# EAGLE board WS2811_Stepper_x2 (EAGLE 9.6.2)
DATE: 20210529; VER: Ver 1.0
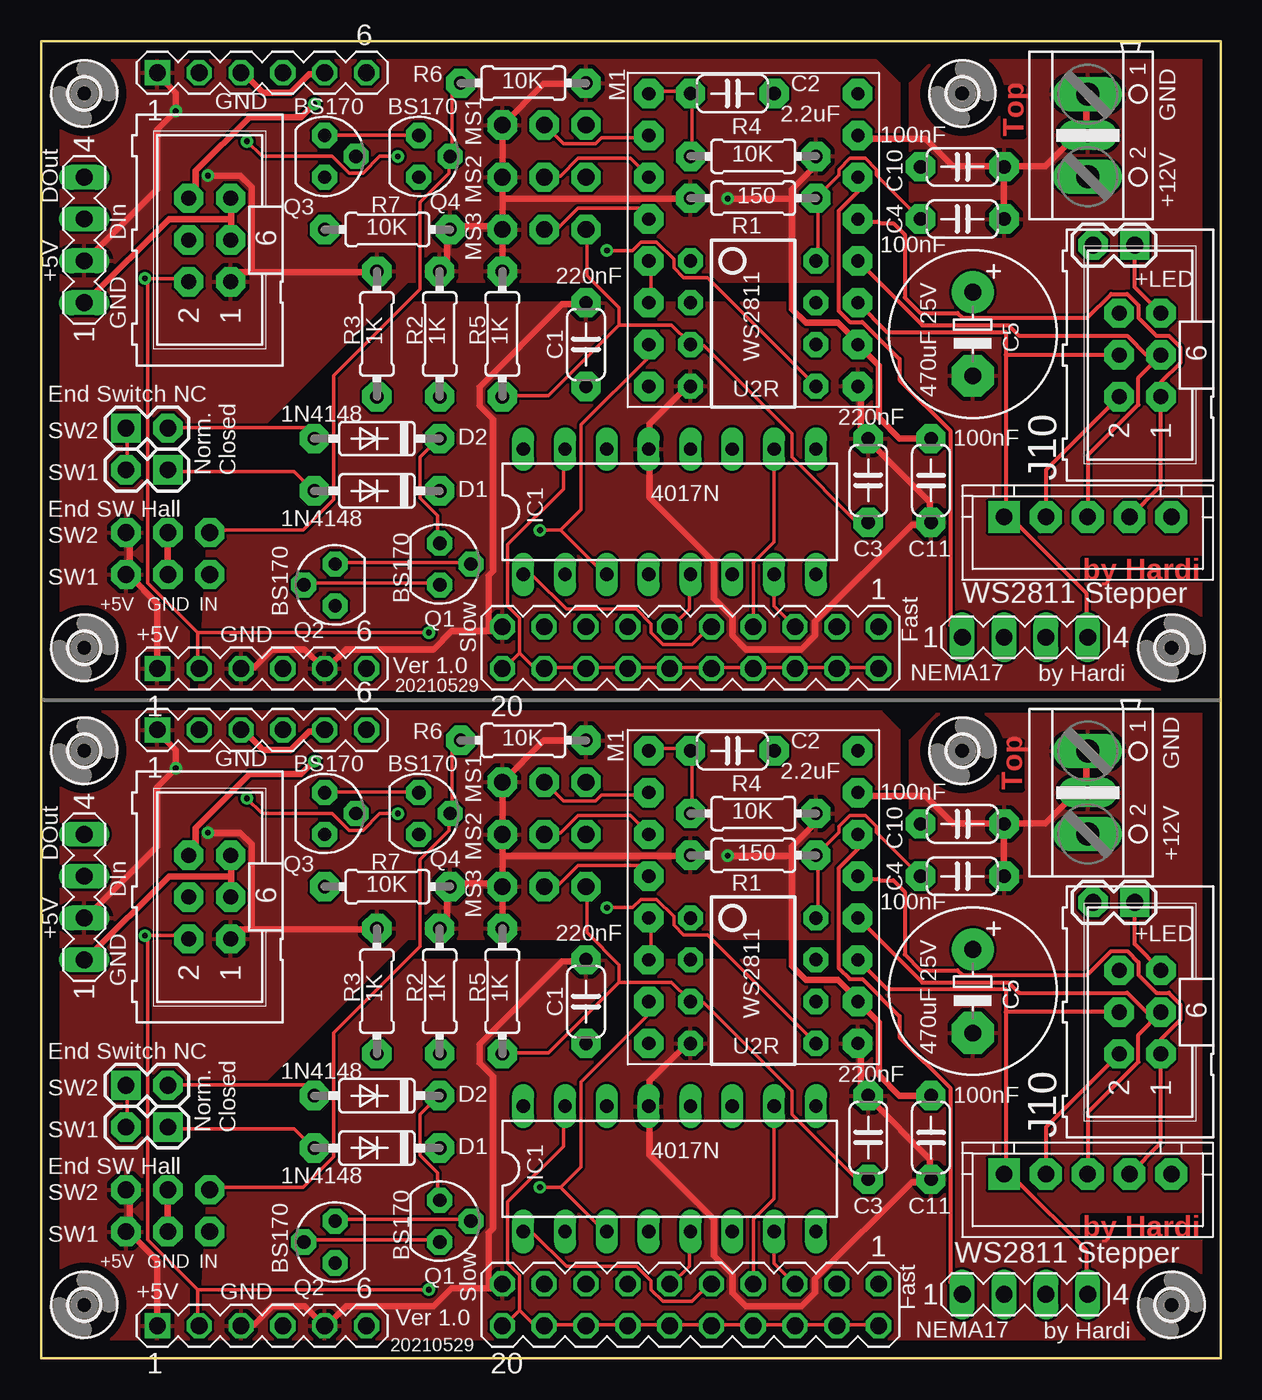
[diagram p0: board, top side]
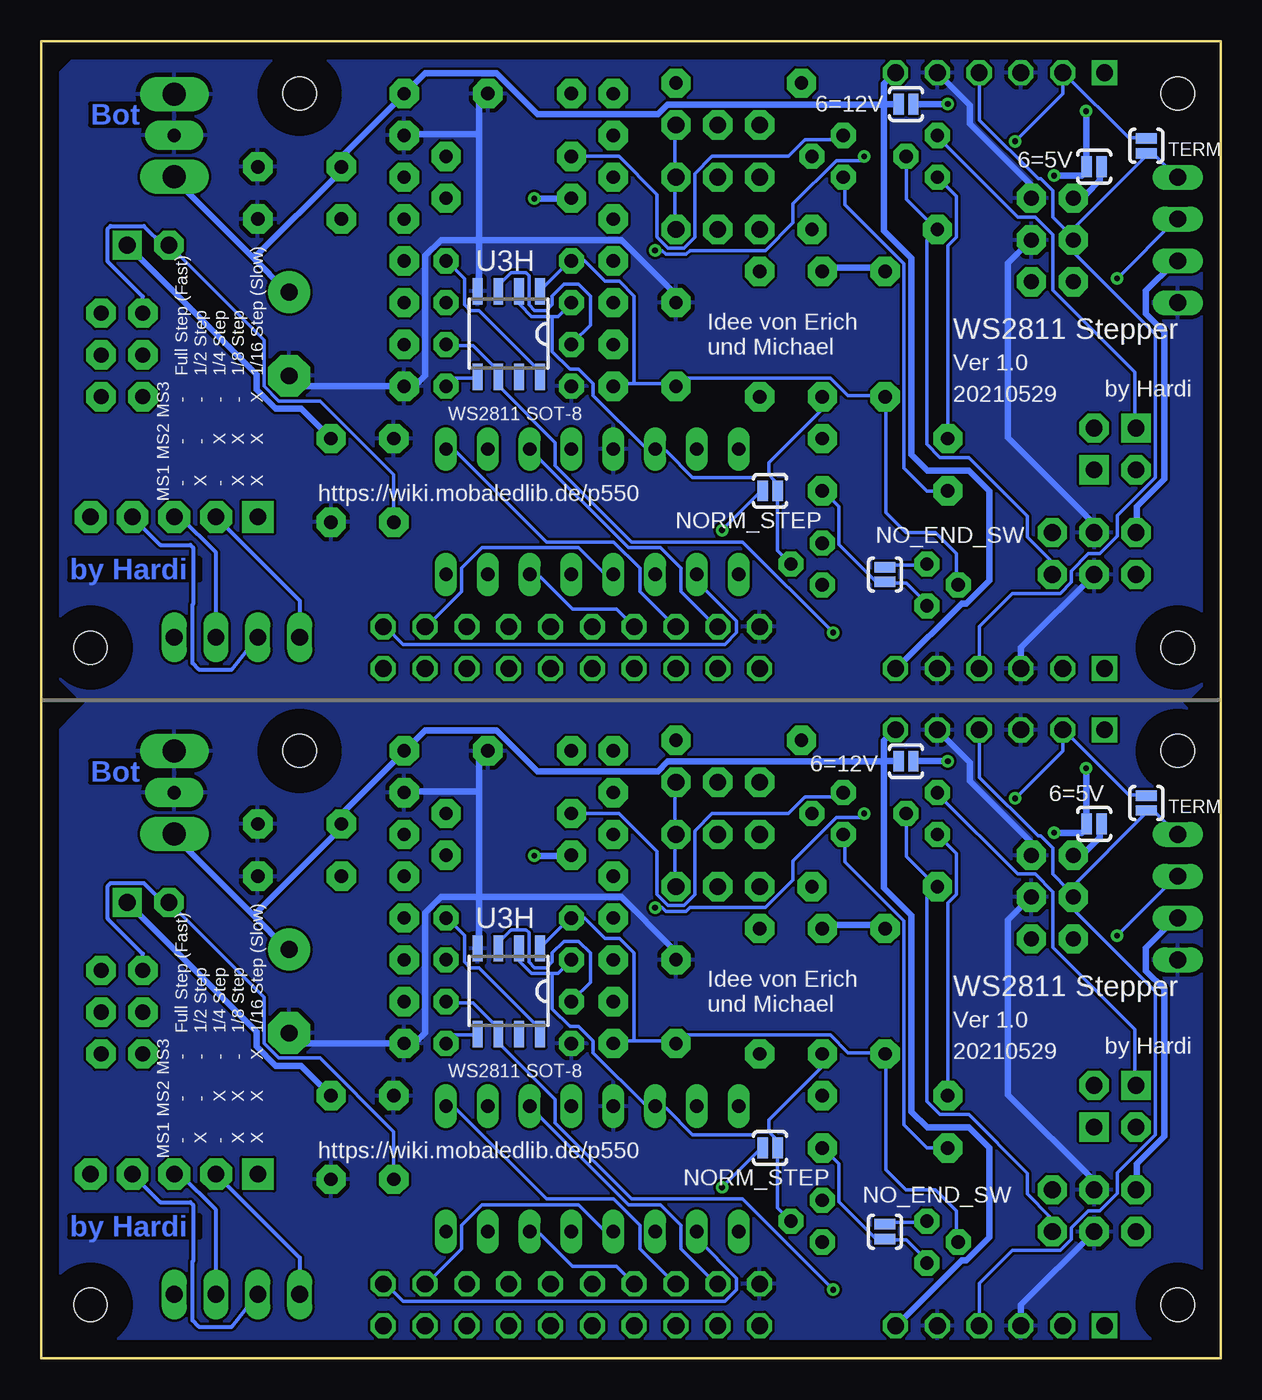
[diagram p1: board, bottom side, seen from below]

Size 71.66 x 80.01 mm. Coordinates in mm from the lower left corner, seen from the top.
Outline: 0,0 71.66,0 71.66,80.01 0,80.01 0,78.74 0,0.16 0,0
Copper layers (1*16): Top 0.035mm / dielectric 1.5mm / Bottom 0.035mm
Design rules "default": minimum track width 6mil, minimum drill 0.35mm, track to track 6mil, track to pad 6mil, pad to pad 6mil, via to via 6mil, smd to smd 6mil, copper to edge 40mil, drill to drill 6mil, minimum pad ring 10mil, minimum via ring 8mil, stop-mask expansion 4mil, vias tented up to drill 0mil, thermal gap 10mil

## Footprints (pad centres in the part's own frame; a part is rotated, then mirrored left to right if it is on the bottom)
SJ_2S-NO = smd 0.635 x 1.27: 1 -0.45,0; 2 0.45,0
C050-024X044 = drill 0.813 pad 1.778 octagon: 1 -2.54,0; 2 2.54,0
E5-10,5 = drill 1.016 pad 2.54: + -2.54,0 | drill 1.016 pad 2.54 octagon: - 2.54,0
1X02 = drill 1.016 pad 1.778 square: 1 0,0 | drill 1.016 pad 1.778 octagon: 2 2.54,0
1X03-CLEANBIG = drill 1.016 pad 1.778 octagon: 1 -2.54,0; 2 0,0; 3 2.54,0
STEPPER_CON = drill 1 pad 1.93 square: 1 0,0 | drill 1 pad 1.93 octagon: 2 2.54,0; 3 5.08,0; 4 7.62,0; 5 10.16,0
MA04-1 = drill 1.016 long: 1 -3.81,0; 2 -1.27,0; 3 1.27,0; 4 3.81,0
DO35-7 = drill 0.813 pad 1.778 octagon: A 3.81,0; C -3.81,0
2,0 = hole 2: 0,0
DIL16 = drill 0.813 long: 1 -8.89,-3.81; 2 -6.35,-3.81; 3 -3.81,-3.81; 4 -1.27,-3.81; 5 1.27,-3.81; 6 3.81,-3.81; 7 6.35,-3.81; 8 8.89,-3.81; 9 8.89,3.81; 10 6.35,3.81; 11 3.81,3.81; 12 1.27,3.81; 13 -1.27,3.81; 14 -3.81,3.81; 15 -6.35,3.81; 16 -8.89,3.81
ML6 = drill 0.914 pad 1.778 octagon: 1 -2.54,-1.27; 2 -2.54,1.27; 3 0,-1.27; 4 0,1.27; 5 2.54,-1.27; 6 2.54,1.27
BOARD_A4988 = drill 0.8 pad 1.778 octagon: +5V 1.27,16.51; DIR 13.97,19.05; ENABLE 13.97,1.27; GND 1.27,19.05; GNDMOT 1.27,3.81; M1A 1.27,11.43; M1B 1.27,13.97; M2A 1.27,8.89; M2AB 1.27,6.35; MS1 13.97,3.81; MS2 13.97,6.35; MS3 13.97,8.89; RESET 13.97,11.43; SLEEP 13.97,13.97; STEP 13.97,16.51; VMOT 1.27,1.27
SOT54E = drill 0.813 pad 1.524 octagon: D -1.27,0; G 0,1.905; S 1.27,0
RCL_0204/7 = drill 0.813 pad 1.778 octagon: 1 -3.81,0; 2 3.81,0
MA06-1 = drill 1.016 pad 1.524 square: 1 -6.35,0 | drill 1.016 pad 1.524 octagon: 2 -3.81,0; 3 -1.27,0; 4 1.27,0; 5 3.81,0; 6 6.35,0
MA10-2 = drill 1.016 octagon: 1 -11.43,-1.27; 2 -11.43,1.27; 3 -8.89,-1.27; 4 -8.89,1.27; 5 -6.35,-1.27; 6 -6.35,1.27; 7 -3.81,-1.27; 8 -3.81,1.27; 9 -1.27,-1.27; 10 -1.27,1.27; 11 1.27,-1.27; 12 1.27,1.27; 13 3.81,-1.27; 14 3.81,1.27; 15 6.35,-1.27; 16 6.35,1.27; 17 8.89,-1.27; 18 8.89,1.27; 19 11.43,-1.27; 20 11.43,1.27
S3PO_MODUL_WS2811_SOUND_MP3-TF-16P_WS2811_AND_ATTINY_WS2811_DIP08 = drill 0.813 pad 1.524 octagon: 1 -3.81,-3.81; 2 -1.27,-3.81; 3 1.27,-3.81; 4 3.81,-3.81; 5 3.81,3.81; 6 1.27,3.81; 7 -1.27,3.81; 8 -3.81,3.81
SOP8 = smd 0.6 x 1.6: 1 -1.905,-2.6; 2 -0.635,-2.6; 3 0.635,-2.6; 4 1.905,-2.6; 5 1.905,2.6; 6 0.635,2.6; 7 -0.635,2.6; 8 -1.905,2.6
AK500/2+M = drill 1.397 long: 1 -2.515,0; 2 2.515,0 | drill 0.813 pad 1.778 long: M 0,0

## Placement (x,y rotation side)
6=5V  SOLDERJUMPERNO  [SJ_2S-NO]  7.7,32.46 180 bottom
6=5V1  SOLDERJUMPERNO  [SJ_2S-NO]  7.7,72.38 180 bottom
6=12V  SOLDERJUMPERNO  [SJ_2S-NO]  19.13,36.27 0 bottom
6=12V1  SOLDERJUMPERNO  [SJ_2S-NO]  19.13,76.19 0 bottom
C1  220nF  [C050-024X044]  33.1,21.67 90 top
C2  2.2uF  [C050-024X044]  41.99,36.91 0 top
C3  220nF  [C050-024X044]  50.24,13.41 90 top
C4  100nF  [C050-024X044]  55.96,29.29 0 top
C5  470uF 25V  [E5-10,5]  56.59,22.3 270 top
C6  220nF  [C050-024X044]  33.1,61.58 90 top
C7  100nF  [C050-024X044]  55.96,72.38 0 top
C8  100nF  [C050-024X044]  54.05,53.33 270 top
C9  2.2uF  [C050-024X044]  41.99,76.82 0 top
C10  100nF  [C050-024X044]  55.96,32.46 0 top
C11  100nF  [C050-024X044]  54.05,13.41 270 top
C12  220nF  [C050-024X044]  50.24,53.33 90 top
C13  470uF 25V  [E5-10,5]  56.59,62.22 270 top
C14  100nF  [C050-024X044]  55.96,69.2 0 top
CON1  End SW1  [1X02]  5.16,16.59 0 top
CON2  End SW2  [1X02]  7.7,14.05 180 top
CON3  End SW1H  [1X03-CLEANBIG]  7.7,7.7 0 top
CON4  STEPPER_CON  [STEPPER_CON]  58.5,11.19 0 top
CON5  End SW2H  [1X03-CLEANBIG]  7.7,10.24 0 top
CON6  NEMA17  [MA04-1]  59.77,3.89 0 top
CON7  LED  [1X02]  66.43,27.7 180 top
CON8  End SW1  [1X02]  5.16,56.5 0 top
CON9  End SW2  [1X02]  7.7,53.96 180 top
CON10  STEPPER_CON  [STEPPER_CON]  58.5,51.11 0 top
CON11  End SW1H  [1X03-CLEANBIG]  7.7,47.61 0 top
CON12  End SW2H  [1X03-CLEANBIG]  7.7,50.15 0 top
CON13  NEMA17  [MA04-1]  59.77,43.8 0 top
CON14  LED  [1X02]  66.43,67.62 180 top
D1  1N4148  [DO35-7]  20.4,12.78 180 top
D2  1N4148  [DO35-7]  20.4,15.95 180 top
D3  1N4148  [DO35-7]  20.4,52.69 180 top
D4  1N4148  [DO35-7]  20.4,55.87 180 top
H1  MOUNT-HOLE2.0  [2,0]  68.66,3.25 0 top
H2  MOUNT-HOLE2.0  [2,0]  2.62,36.91 0 top
H3  MOUNT-HOLE2.0  [2,0]  2.62,3.25 0 top
H4  MOUNT-HOLE2.0  [2,0]  55.96,36.91 0 top
H5  MOUNT-HOLE2.0  [2,0]  68.66,43.17 0 top
H6  MOUNT-HOLE2.0  [2,0]  2.62,76.82 0 top
H7  MOUNT-HOLE2.0  [2,0]  2.62,43.17 0 top
H8  MOUNT-HOLE2.0  [2,0]  55.96,76.82 0 top
IC1  4017N  [DIL16]  38.18,11.51 0 top
IC2  4017N  [DIL16]  38.18,51.42 0 top
IN  [ML6]  10.24,28.02 90 top
IN1  [ML6]  10.24,67.93 90 top
J1  [ML6]  66.75,60.95 90 top
J10  [ML6]  66.75,21.03 90 top
JP1  MS1  [1X03-CLEANBIG]  30.56,35 0 top
JP2  MS2  [1X03-CLEANBIG]  30.56,31.83 0 top
JP3  MS3  [1X03-CLEANBIG]  30.56,28.65 0 top
JP4  MS1  [1X03-CLEANBIG]  30.56,74.92 0 top
JP5  MS2  [1X03-CLEANBIG]  30.56,71.74 0 top
JP6  MS3  [1X03-CLEANBIG]  30.56,68.57 0 top
M1  BOARD_A4988  [BOARD_A4988]  50.88,38.18 180 top
M2  BOARD_A4988  [BOARD_A4988]  50.88,78.09 180 top
NO_END_SW  SOLDERJUMPERNO  [SJ_2S-NO]  20.4,7.7 90 bottom
NO_END_SW1  SOLDERJUMPERNO  [SJ_2S-NO]  20.4,47.61 90 bottom
NORM_STEP  SOLDERJUMPERNO  [SJ_2S-NO]  27.38,12.78 180 bottom
NORM_STEP1  SOLDERJUMPERNO  [SJ_2S-NO]  27.38,52.69 180 bottom
Q1  BS170  [SOT54E]  24.21,8.33 270 top
Q2  BS170  [SOT54E]  17.86,7.06 90 top
Q3  BS170  [SOT54E]  17.22,33.1 270 top
Q4  BS170  [SOT54E]  22.94,33.1 270 top
Q5  BS170  [SOT54E]  24.21,48.25 270 top
Q6  BS170  [SOT54E]  17.86,46.98 90 top
Q7  BS170  [SOT54E]  17.22,73.01 270 top
Q8  BS170  [SOT54E]  22.94,73.01 270 top
R1  150  [RCL_0204/7]  43.26,30.56 0 top
R2  1K  [RCL_0204/7]  24.21,22.3 90 top
R3  1K  [RCL_0204/7]  20.4,22.3 90 top
R4  10K  [RCL_0204/7]  43.26,33.1 0 top
R5  1K  [RCL_0204/7]  28.02,22.3 90 top
R6  10K  [RCL_0204/7]  29.29,37.54 0 top
R7  10K  [RCL_0204/7]  21.03,28.65 0 top
R8  150  [RCL_0204/7]  43.26,70.47 0 top
R9  1K  [RCL_0204/7]  24.21,62.22 90 top
R10  1K  [RCL_0204/7]  20.4,62.22 90 top
R11  10K  [RCL_0204/7]  43.26,73.01 0 top
R12  1K  [RCL_0204/7]  28.02,62.22 90 top
R13  10K  [RCL_0204/7]  29.29,77.46 0 top
R14  10K  [RCL_0204/7]  21.03,68.57 0 top
SV1  [MA06-1]  13.41,1.98 0 top
SV2  [MA04-1]  2.62,28.02 90 top
SV3  [MA06-1]  13.41,38.18 0 top
SV4  [MA10-2]  39.45,3.25 180 top
SV5  [MA06-1]  13.41,41.9 0 top
SV6  [MA06-1]  13.41,78.09 0 top
SV7  [MA04-1]  2.62,67.93 90 top
SV8  [MA10-2]  39.45,43.17 180 top
TERM  SOLDERJUMPERNO  [SJ_2S-NO]  4.52,33.73 90 bottom
TERM1  SOLDERJUMPERNO  [SJ_2S-NO]  4.52,73.65 90 bottom
U2R  WS2811  [S3PO_MODUL_WS2811_SOUND_MP3-TF-16P_WS2811_AND_ATTINY_WS2811_DIP08]  43.26,22.94 270 top
U2R1  WS2811  [S3PO_MODUL_WS2811_SOUND_MP3-TF-16P_WS2811_AND_ATTINY_WS2811_DIP08]  43.26,62.85 270 top
U3H  WS2811 SOT-8  [SOP8]  43.26,22.3 180 bottom
U3H1  WS2811 SOT-8  [SOP8]  43.26,62.22 180 bottom
X1  AK500/2+M  [AK500/2+M]  63.58,34.37 270 top
X2  AK500/2+M  [AK500/2+M]  63.58,74.28 270 top

## Library data of the parts
6=5V 6=5V1 6=12V 6=12V1 NO_END_SW NO_END_SW1 NORM_STEP NORM_STEP1 TERM TERM1 = SparkFun-Retired
C1-C14 = resistor
CON1 CON2 CON7-CON9 CON14 = SparkFun-Connectors
CON3 CON5 CON11 CON12 JP1-JP6 = adafruit
CON4 CON10 = Connectors_Inline3_7
CON6 CON13 SV1-SV8 = con-lstb; OC_FARNELL: unknown; OC_NEWARK: unknown
D1-D4 = diode
H1-H8 = holes
IC1 IC2 = 40xx
IN IN1 J1 J10 = con-harting-ml; OC_FARNELL: unknown; OC_NEWARK: unknown
M1 M2 = Clean-Kong
Q1-Q8 = transistor-small-signal
R1-R14 = Sound_MP3-TF-16P_and_WS2811; SPICEPREFIX: R
U2R U2R1 = S3PO_Modul_WS2811; PROD_ID: IC-09439
U3H U3H1 = S3PO_Modul_WS2811
X1 X2 = Arduino_fuer_LEDs_DCC_2

## Nets
+5V: 6=5V.2 C11.1 CON3.1 CON5.1 CON7.1 IN.1 J10.5 JP1.1 JP2.1 JP3.1 M1.+5V R1.1 R2.2 R3.2 R4.2 R5.2 R6.2 R7.2 SV1.1 SV2.2 SV3.1
+5V1: 6=5V1.2 C8.1 CON11.1 CON12.1 CON14.1 IN1.1 J1.5 JP4.1 JP5.1 JP6.1 M2.+5V R8.1 R9.2 R10.2 R11.2 R12.2 R13.2 R14.2 SV5.1 SV6.1 SV7.2
DIR: C1.1 M1.DIR Q1.S Q2.G R3.1 U2R.1 U3H.1
DIR1: C6.1 M2.DIR Q5.S Q6.G R10.1 U2R1.1 U3H1.1
GND: C1.2 C2.2 C3.2 C4.2 C5.- C10.2 C11.2 CON3.2 CON5.2 IC1.13 IN.3 IN.5 M1.GND M1.GNDMOT SV1.3 SV1.5 SV2.1 SV3.3 SV3.5 SV4.19 U2R.4 U3H.4 X1.1 X1.M
GND1: C6.2 C7.2 C8.2 C9.2 C12.2 C13.- C14.2 CON11.2 CON12.2 IC2.13 IN1.3 IN1.5 M2.GND M2.GNDMOT SV5.3 SV5.5 SV6.3 SV6.5 SV7.1 SV8.19 U2R1.4 U3H1.4 X2.1 X2.M
LED: C3.1 CON7.2 J10.6 JP1.3 JP2.3 JP3.3 R5.1 U2R.3 U3H.3
LED1: C12.1 CON14.2 J1.6 JP4.3 JP5.3 JP6.3 R12.1 U2R1.3 U3H1.3
N$1: M1.RESET M1.SLEEP
N$2: IN.2 SV1.2 SV2.3 U2R.6 U3H.6
N$3: SV3.2 TERM.2 U2R.5 U3H.5
N$4: IN.4 SV1.4 SV2.4 SV3.4 TERM.1
N$5: C4.1 R1.2 U2R.8 U3H.8
N$6: C2.1 CON1.1 CON2.2 M1.ENABLE Q3.D Q4.D R4.1
N$7: 6=12V.1 C5.+ C10.1 M1.VMOT SV1.6 SV3.6 X1.2
N$8: CON2.1 D1.A Q4.S
N$9: CON1.2 D2.A Q3.S
N$10: CON5.3 Q4.G R6.1
N$11: D2.C Q1.D
N$12: JP6.2 M2.MS3
N$13: D1.C NO_END_SW.1 Q2.D
N$14: JP2.2 M1.MS2
N$15: 6=5V.1 6=12V.2 IN.6
N$16: CON3.3 Q3.G R7.1
N$17: JP5.2 M2.MS2
N$18: IC1.2 SV4.1
N$19: IC1.4 SV4.3
N$20: IC1.7 SV4.5
N$21: IC1.10 SV4.7
N$22: JP1.2 M1.MS1
N$23: IC1.1 SV4.9
N$24: IC1.5 SV4.11
N$25: IC1.6 SV4.13
N$26: IC1.9 SV4.15
N$27: JP3.2 M1.MS3
N$28: IC1.11 SV4.17
N$29: IC1.15 SV4.2 SV4.4 SV4.6 SV4.8 SV4.10 SV4.12 SV4.14 SV4.16 SV4.18 SV4.20
N$30: JP4.2 M2.MS1
N$31: CON4.2 CON6.1 J10.2 M1.M2AB
N$32: CON10.2 CON13.1 J1.2 M2.M2AB
N$33: IC1.3 M1.STEP NORM_STEP.2
N$34: CON10.4 CON13.2 J1.1 M2.M2A
N$35: CON4.1 CON6.4 J10.4 M1.M1B
N$36: CON10.3 CON13.3 J1.3 M2.M1A
N$37: CON10.1 CON13.4 J1.4 M2.M1B
N$38: M2.RESET M2.SLEEP
N$39: IN1.2 SV5.2 SV7.3 U2R1.6 U3H1.6
N$40: CON4.4 CON6.2 J10.1 M1.M2A
N$41: CON4.3 CON6.3 J10.3 M1.M1A
N$42: SV6.2 TERM1.2 U2R1.5 U3H1.5
N$43: IN1.4 SV5.4 SV6.4 SV7.4 TERM1.1
N$44: C14.1 R8.2 U2R1.8 U3H1.8
N$45: 6=12V1.1 C7.1 C13.+ M2.VMOT SV5.6 SV6.6 X2.2
N$46: C9.1 CON8.1 CON9.2 M2.ENABLE Q7.D Q8.D R11.1
N$47: CON9.1 D3.A Q8.S
N$48: CON8.2 D4.A Q7.S
N$49: D4.C Q5.D
N$50: D3.C NO_END_SW1.1 Q6.D
N$51: CON11.3 Q7.G R14.1
N$52: CON12.3 Q8.G R13.1
N$53: IC2.4 SV8.3
N$54: IC2.7 SV8.5
N$55: IC2.10 SV8.7
N$56: IC2.1 SV8.9
N$57: IC2.5 SV8.11
N$58: IC2.6 SV8.13
N$59: IC2.9 SV8.15
N$60: IC2.11 SV8.17
N$61: IC2.15 SV8.2 SV8.4 SV8.6 SV8.8 SV8.10 SV8.12 SV8.14 SV8.16 SV8.18 SV8.20
N$62: IC2.3 M2.STEP NORM_STEP1.2
N$63: IC2.2 SV8.1
N$64: 6=5V1.1 6=12V1.2 IN1.6
STEP: IC1.14 NO_END_SW.2 NORM_STEP.1 Q1.G Q2.S R2.1 U2R.2 U3H.2
STEP1: IC2.14 NO_END_SW1.2 NORM_STEP1.1 Q5.G Q6.S R9.1 U2R1.2 U3H1.2
VDD: IC1.16
VDD1: IC2.16
VSS: IC1.8
VSS1: IC2.8

## Tracks (layer width: path | path; a pad name or v marks a point on that pad's centre or on a via)
+5V  (via drill 0.35)
  Top 0.254: J10.5 66.43,25.16 CON7.1
  Top 0.406: SV1.1 7.06,5.94 5.39,7.62 CON3.1 5.39,7.9 5.39,10.13 CON5.1 | SV3.1 7.06,38.08 8.18,36.96 v8.18,35.84 7.06,34.72 7.06,31.09 2.87,26.9 SV2.2 | v10.13,31.93 12.09,31.93 12.78,31.24 12.78,26.06 | 45.62,30.53 45.62,23.82 46.46,22.99 48.41,22.99 49.53,21.87 M1.+5V 50.88,20.4 50.88,17.22 52.15,15.95 C11.1 | 45.62,30.53 45.62,31.09 47.02,32.49 47.02,33.05 R4.2 | R2.2 24.38,26.34 24.66,26.62 24.66,28.57 R7.2 24.94,28.85 28.02,28.85 | R5.2 JP3.1 28.02,28.85 | 28.02,28.85 28.02,30.53 | 28.02,30.53 JP2.1 JP1.1 30.53,37.52 33.05,37.52 R6.2 | 28.02,30.53 39.19,30.53 R1.1 | v41.71,30.53 45.62,30.53 | R3.2 20.19,26.06 12.78,26.06 | 12.78,26.06 12.09,26.06 IN.1
  Bottom 0.406: v8.18,35.84 8.18,32.49 6=5V.2 8.18,32.21 8.46,31.93 v10.13,31.93 | CON5.1 5.11,10.41 5.11,11.81 3.43,13.49 3.43,22.43 4.55,23.55 4.55,24.94 2.87,26.62 SV2.2 | R3.2 20.47,26.34 24.1,26.34 R2.2 | v41.71,30.53 39.47,30.53 R1.1 | C11.1 55.88,17.78 57.41,17.78 58.57,18.94 58.57,19.84 CON7.1
  pour Top: 0.08,0.71 0.08,39.29 51.03,39.29 52.15,38.18 52.15,27.38 50.24,25.48 22.3,25.48 8.97,12.14 8.97,0.71
+5V1  (via drill 0.35)
  Top 0.254: J1.5 66.43,65.08 CON14.1
  Top 0.406: SV5.1 7.06,45.86 5.39,47.54 CON11.1 5.39,47.82 5.39,50.05 CON12.1 | SV6.1 7.06,77.99 8.18,76.88 v8.18,75.76 7.06,74.64 7.06,71.01 2.87,66.82 SV7.2 | v10.13,71.85 12.09,71.85 12.78,71.16 12.78,65.98 | 45.62,70.45 45.62,63.74 46.46,62.91 48.41,62.91 49.53,61.79 M2.+5V 50.88,60.31 50.88,57.14 52.15,55.87 C8.1 | 45.62,70.45 45.62,71.01 47.02,72.41 47.02,72.96 R11.2 | R9.2 24.38,66.26 24.66,66.54 24.66,68.49 R14.2 24.94,68.77 28.02,68.77 | R12.2 JP6.1 28.02,68.77 | 28.02,68.77 28.02,70.45 | 28.02,70.45 JP5.1 JP4.1 30.53,77.43 33.05,77.43 R13.2 | 28.02,70.45 39.19,70.45 R8.1 | v41.71,70.45 45.62,70.45 | R10.2 20.19,65.98 12.78,65.98 | 12.78,65.98 12.09,65.98 IN1.1
  Bottom 0.406: v8.18,75.76 8.18,72.41 6=5V1.2 8.18,72.12 8.46,71.85 v10.13,71.85 | CON12.1 5.11,50.33 5.11,51.73 3.43,53.41 3.43,62.35 4.55,63.46 4.55,64.86 2.87,66.54 SV7.2 | R10.2 20.47,66.26 24.1,66.26 R9.2 | v41.71,70.45 39.47,70.45 R8.1 | C8.1 55.88,57.7 57.41,57.7 58.57,58.86 58.57,59.76 CON14.1
  pour Top: 0.08,40.63 0.08,79.68 49.92,79.68 52.15,77.46 52.15,67.3 50.24,65.39 22.3,65.39 8.97,52.06 8.97,40.63
DIR
  Top 0.203: Q2.G 16.08,7.19 24.08,7.19 Q1.S
  Bottom 0.203: U3H.1 41.33,24.97 39.55,26.75 U2R.1 38.66,26.75 37.41,25.5 36.53,25.5 35.64,24.61 35.64,19.28 | 35.64,19.28 33.15,19.28 C1.1 32.97,19.28 32.61,19.63 23.72,19.63 22.66,18.57 20.52,18.57 R3.1 20.35,18.39 20.35,11.46 19.13,10.24 17.35,10.24 16.08,8.97 16.08,7.19 Q2.G | 35.64,19.28 36.88,19.28 M1.DIR
DIR1
  Top 0.203: Q6.G 16.08,47.11 24.08,47.11 Q5.S
  Bottom 0.203: U3H1.1 41.33,64.89 39.55,66.66 U2R1.1 38.66,66.66 37.41,65.42 36.53,65.42 35.64,64.53 35.64,59.2 | 35.64,59.2 33.15,59.2 C6.1 32.97,59.2 32.61,59.55 23.72,59.55 22.66,58.48 20.52,58.48 R10.1 20.35,58.31 20.35,51.37 19.13,50.15 17.35,50.15 16.08,48.88 16.08,47.11 Q6.G | 35.64,59.2 36.88,59.2 M2.DIR
GND
  Top 0.406: 11.53,29.29 11.53,30.53 IN.5 | 11.53,29.29 11.53,28.02 IN.3 | SV2.1 2.87,24.38 7.77,29.29 11.53,29.29 | SV3.5 17.12,38.08 16.28,38.08 15.16,36.96 13.49,36.96 12.37,38.08 SV3.3 | U2R.4 39.19,19.07 36.96,16.84 36.96,15.44 IC1.13 36.96,15.16 36.96,12.37 40.87,8.46 40.87,6.22 41.99,5.11 41.99,3.99 42.82,3.15 46.18,3.15 47.02,3.99 47.02,4.83 52.88,10.69 54,10.69 C11.2 54,10.97 54,12.09 50.37,15.72 C3.2 50.09,16 49.81,16.28 49.81,19.07 M1.GND | SV1.3 12.37,2.03 12.93,2.03 14.05,3.15 16,3.15 17.12,2.03 SV1.5 17.4,2.03 18.52,3.15 23.83,3.15 24.94,4.27 27.18,4.27 | 27.18,4.27 28.02,4.27 SV4.19 | C4.2 58.47,29.41 58.47,32.21 C10.2 | X1.1 63.5,36.68 63.5,34.44 X1.M 63.5,34.16 62.66,34.16 60.99,32.49 58.75,32.49 C10.2 | C10.2 58.47,32.49 55.4,32.49 53.72,34.16 49.81,34.16 M1.GNDMOT | 27.18,4.27 27.18,7.62 27.46,7.9 27.46,17.12 26.62,17.96 26.62,19.07 31.65,24.11 33.05,24.11 C1.2 | CON3.2 CON5.2
  Bottom 0.406: IN.3 11.53,28.02 12.93,26.62 12.93,16 7.7,10.77 CON5.2 | IN.5 11.53,30.81 11.53,31.37 15.24,35.08 15.24,36.2 SV3.5 | 45.06,34.44 45.06,36.4 44.78,36.68 C2.2 | 45.06,34.44 45.06,28.02 | 45.06,28.02 45.06,24.94 U3H.4 | 45.06,28.02 36.4,28.02 33.33,24.94 33.33,24.38 C1.2 | 45.06,34.44 49.53,34.44 M1.GNDMOT | CON3.2 12.14,3.25 SV1.3 | C5.- 55.96,19.13 M1.GND 48.97,19.13 48.34,19.76 48.34,27.06 47.38,28.02 45.06,28.02
  pour Top: 9.6,0.71 10.24,12.14 22.3,24.21 49.92,24.21 52.78,27.06 52.78,37.54 54.37,39.13 71.2,39.13 71.2,0.71
  pour Bottom: 1.82,0.23 0.08,1.98 0.08,37.54 2.3,39.76 68.97,39.76 71.2,37.54 71.2,1.98 69.45,0.23
GND1
  Top 0.406: 11.53,69.2 11.53,70.45 IN1.5 | 11.53,69.2 11.53,67.93 IN1.3 | SV7.1 2.87,64.3 7.77,69.2 11.53,69.2 | SV6.5 17.12,77.99 16.28,77.99 15.16,76.88 13.49,76.88 12.37,77.99 SV6.3 | U2R1.4 39.19,58.99 36.96,56.76 36.96,55.36 IC2.13 36.96,55.08 36.96,52.29 40.87,48.38 40.87,46.14 41.99,45.02 41.99,43.91 42.82,43.07 46.18,43.07 47.02,43.91 47.02,44.74 52.88,50.61 54,50.61 C8.2 54,50.89 54,52.01 50.37,55.64 C12.2 50.09,55.92 49.81,56.2 49.81,58.99 M2.GND | SV5.3 12.37,41.95 12.93,41.95 14.05,43.07 16,43.07 17.12,41.95 SV5.5 17.4,41.95 18.52,43.07 23.83,43.07 24.94,44.19 27.18,44.19 | 27.18,44.19 28.02,44.19 SV8.19 | C14.2 58.47,69.33 58.47,72.12 C7.2 | X2.1 63.5,76.6 63.5,74.36 X2.M 63.5,74.08 62.66,74.08 60.99,72.41 58.75,72.41 C7.2 | C7.2 58.47,72.41 55.4,72.41 53.72,74.08 49.81,74.08 M2.GNDMOT | 27.18,44.19 27.18,47.54 27.46,47.82 27.46,57.04 26.62,57.88 26.62,58.99 31.65,64.02 33.05,64.02 C6.2 | CON11.2 CON12.2
  Bottom 0.406: IN1.3 11.53,67.93 12.93,66.54 12.93,55.92 7.7,50.69 CON12.2 | IN1.5 11.53,70.73 11.53,71.29 15.24,75 15.24,76.11 SV6.5 | 45.06,74.36 45.06,76.32 44.78,76.6 C9.2 | 45.06,74.36 45.06,67.93 | 45.06,67.93 45.06,64.86 U3H1.4 | 45.06,67.93 36.4,67.93 33.33,64.86 33.33,64.3 C6.2 | 45.06,74.36 49.53,74.36 M2.GNDMOT | CON11.2 12.14,43.17 SV5.3 | C13.- 55.96,59.04 M2.GND 48.97,59.04 48.34,59.68 48.34,66.97 47.38,67.93 45.06,67.93
  pour Top: 9.6,40.63 10.24,52.06 22.3,64.12 49.92,64.12 52.78,66.98 52.78,77.46 55,79.68 71.2,79.68 71.2,40.63
  pour Bottom: 1.82,40.15 0.08,41.9 0.08,77.46 2.3,79.68 68.97,79.68 71.2,77.46 71.2,41.9 69.45,40.15
LED
  Top 0.203: C3.1 50.22,10.92 49.5,10.92 45.59,14.83 45.59,16.26 40.26,21.59 39.55,21.59 U2R.3 39.37,21.77 38.3,22.84 35.1,22.84 | 35.1,22.84 30.84,18.57 28.17,18.57 R5.1 | 35.1,22.84 35.1,23.9 33.15,25.86 33.15,28.52 JP3.3
  Bottom 0.203: JP3.3 33.15,28.7 33.15,31.73 JP2.3 33.15,31.9 33.15,34.92 JP1.3 | U3H.3 43.82,24.97 43.82,25.32 43.1,26.04 42.22,26.04 42.04,25.86 42.04,24.08 41.68,23.72 40.97,23.72 40.61,24.08 40.61,24.61 39.9,25.32 39.01,25.32 38.3,24.61 38.3,22.84 39.37,21.77 U2R.3 | CON7.2 58.12,21.92 58.12,19.13 57.22,18.24 54.72,18.24 50.24,13.76 C3.1
  Bottom 0.254: CON7.2 64.26,27.7 65.43,28.87 67.44,28.87 67.6,28.7 67.6,26.69 65.48,24.57 J10.6
LED1
  Top 0.203: C12.1 50.22,50.84 49.5,50.84 45.59,54.75 45.59,56.17 40.26,61.51 39.55,61.51 U2R1.3 39.37,61.69 38.3,62.75 35.1,62.75 | 35.1,62.75 30.84,58.48 28.17,58.48 R12.1 | 35.1,62.75 35.1,63.82 33.15,65.78 33.15,68.44 JP6.3
  Bottom 0.203: JP6.3 33.15,68.62 33.15,71.64 JP5.3 33.15,71.82 33.15,74.84 JP4.3 | U3H1.3 43.82,64.89 43.82,65.24 43.1,65.95 42.22,65.95 42.04,65.78 42.04,64 41.68,63.64 40.97,63.64 40.61,64 40.61,64.53 39.9,65.24 39.01,65.24 38.3,64.53 38.3,62.75 39.37,61.69 U2R1.3 | CON14.2 58.12,61.84 58.12,59.05 57.22,58.16 54.72,58.16 50.24,53.68 C12.1
  Bottom 0.254: CON14.2 64.26,67.62 65.43,68.78 67.44,68.78 67.6,68.62 67.6,66.61 65.48,64.49 J1.6
N$1
  Top 0.203: M1.SLEEP 37.06,24.26 37.06,26.75 M1.RESET
N$2  (via drill 0.35)
  Top 0.203: 6.48,25.68 8.79,25.68 8.97,25.5 IN.2 | 9.5,4.17 9.5,2.03 SV1.2 | 9.5,4.17 6.48,7.19 6.48,25.68 | 6.48,25.68 v6.3,25.68 | 9.5,4.17 v23.55,4.17
  Bottom 0.203: U2R.6 47.02,21.59 45.42,21.59 43.99,20.17 43.99,19.81 U3H.6 43.82,19.63 43.82,19.1 40.44,15.72 40.44,14.3 35.81,9.68 29.06,9.68 v23.55,4.17 | v6.3,25.68 2.74,29.23 SV2.3
N$3  (via drill 0.35)
  Top 0.203: v34.37,27.38 35.93,27.38 36.43,27.89 37.38,27.89 38.43,26.84 38.43,26.32 39.03,25.73 40.46,25.73 U2R.5 | v12.49,34.01 13.41,33.1 17.69,33.1 18.71,32.08 19.55,32.08 20.56,33.1 v21.67,33.1
  Bottom 0.203: U3H.5 45.24,19.63 46.66,19.63 47.02,19.28 U2R.5 | TERM.2 4.52,34.21 5.59,34.21 9.5,38.12 SV3.2 9.6,36.91 v12.49,34.01 | v34.37,27.38 33.95,27.38 33.72,27.15 32.48,27.15 32.25,27.38 27.67,27.38 25.98,29.07 25.98,30.21 23.36,32.84 21.92,32.84 v21.67,33.1
N$4
  Bottom 0.203: 4.52,33.15 3.99,33.15 2.74,31.9 SV2.4 | IN.4 8.97,27.28 3.99,22.3 3.99,13.59 6.3,11.28 6.3,10.02 7.35,8.97 8.04,8.97 9.09,7.92 9.09,7.22 9.76,6.55 12.65,6.55 14.66,4.55 14.66,2.03 SV1.4 | 9.32,28.52 8.97,28.17 IN.4 | 9.32,28.52 10.21,29.41 10.21,31.01 10.92,31.73 11.1,31.73 14.66,35.28 14.66,38.12 SV3.4 | 4.52,33.15 9.14,28.52 9.32,28.52 | 4.52,33.15 TERM.1 | 9.32,28.52 IN.4
N$5
  Top 0.203: U2R.8 47.19,26.75 47.19,30.48 R1.2 48.46,31.95 48.46,32.3 49.13,32.97 50.08,32.97 50.75,32.3 50.75,31.95 C4.1
  Bottom 0.203: U3H.8 41.5,19.81 41.5,20.17 45.06,23.72 45.59,23.72 45.95,24.08 45.95,25.68 47.02,26.75 U2R.8
N$6
  Top 0.203: R4.1 39.55,33.15 39.55,36.88 C2.1 39.37,37.06 37.06,37.06 M1.ENABLE | CON2.2 5.23,14.12 5.23,16.43 CON1.1 | Q3.D 17.32,34.39 22.83,34.39 Q4.D
  Bottom 0.203: CON1.1 5.23,16.61 5.23,19.99 10.21,24.97 10.21,28.35 11.28,29.41 12.34,29.41 17.15,34.21 Q3.D | Q4.D 23.19,34.11 25.26,34.11 26.28,33.1 30.9,33.1 31.95,32.05 31.95,28.18 32.62,27.51 33.57,27.51 34.24,28.18 34.24,30.78 36.56,33.1 R4.1
N$7
  Bottom 0.406: SV3.6 19.91,38.08 20.47,37.52 20.47,36.27 | 20.47,36.27 20.47,28.59 18.8,26.91 18.8,14.99 17.83,14.02 15.29,14.02 14.05,12.78 14.05,7.34 15.44,5.94 15.72,5.94 19.63,2.03 SV1.6 | 58.75,26.9 56.79,24.94 C5.+ | 58.75,26.9 63.5,31.65 X1.2 | 58.75,26.9 53.44,32.21 C10.1 53.16,32.49 53.16,33.33 49.81,36.68 M1.VMOT 49.53,36.96 48.34,38.15 44.01,38.15 41.52,35.66 34.2,35.66 33.61,36.25 20.5,36.25 20.47,36.27 | 6=12V.1 20.47,36.27
N$8
  Top 0.203: CON2.1 7.72,13.95 15.37,13.95 16.43,12.88 D1.A
  Bottom 0.203: Q4.S 22.83,31.73 22.83,30.17 19.25,26.59 19.25,14.17 17.86,12.78 D1.A
N$9
  Top 0.203: 16.08,16.61 16.08,16.43 16.43,16.08 D2.A 16.08,16.61 | 16.08,16.61 7.72,16.61 CON1.2
  Bottom 0.203: D2.A 16.59,27.67 16.08,28.18 16.08,30.68 Q3.S
N$10
  Top 0.203: R6.1 25.32,37.41 24.97,37.06 24.97,33.15 Q4.G 24.79,32.97 24.79,32.08 23.01,30.3 23.01,25.02 17.75,19.76 17.75,12.24 15.9,10.39 10.39,10.39 CON5.3
N$11
  Top 0.203: Q1.D 24.08,9.68 24.08,11.28 23.01,12.34 23.01,14.83 24.08,15.9 D2.C
N$12
  Top 0.203: JP6.2 30.66,68.62 31.37,68.62 32.61,69.86 36.35,69.86 36.88,69.33 M2.MS3
N$13
  Bottom 0.203: Q2.D 17.86,5.94 19.1,7.19 20.35,7.19 NO_END_SW.1 20.52,7.37 21.06,7.37 23.19,9.5 23.19,11.81 24.08,12.7 D1.C
N$14
  Top 0.203: JP2.2 30.66,31.9 31.55,31.9 32.61,32.97 35.81,32.97 36.88,31.9 M1.MS2
N$15  (via drill 0.35)
  Top 0.406: v16.59,36.27 15.8,35.48 12.65,35.48 9.4,32.23 9.4,30.99 IN.6
  Bottom 0.406: 6=5V.1 7.34,32.21 7.34,31.65 8.18,30.81 8.74,30.81 IN.6 | 6=12V.2 v16.59,36.27
N$16
  Bottom 0.203: Q3.G 19.1,32.97 19.1,30.48 17.32,28.7 R7.1 17.86,28.02 17.86,15.61 17.06,14.81 15.32,14.81 11.76,11.25 11.76,9.98 10.39,8.61 10.39,7.72 CON3.3
N$17
  Top 0.203: JP5.2 30.66,71.82 31.55,71.82 32.61,72.89 35.81,72.89 36.88,71.82 M2.MS2
N$18
  Bottom 0.203: IC1.2 31.72,7.54 31.72,7.19 29.41,4.88 29.41,4.17 30.12,3.45 49.68,3.45 50.75,4.52 SV4.1
N$19
  Bottom 0.203: IC1.4 37.06,7.72 37.41,7.72 39.01,9.32 44.88,9.32 46.13,8.08 46.13,6.66 48.26,4.52 SV4.3
N$20
  Top 0.203: IC1.7 44.53,5.77 45.77,4.52 SV4.5
N$21
  Top 0.203: IC1.10 44.53,9.68 43.28,8.43 43.28,4.52 SV4.7
N$22
  Top 0.203: M1.MS1 36.88,34.21 34.04,34.21 33.68,33.86 31.72,33.86 30.66,34.92 JP1.2
N$23
  Top 0.203: IC1.1 29.41,7.54 29.95,7.54 31.9,5.59 36.17,5.59 37.06,4.7 37.06,4.17 37.77,3.45 39.55,3.45 40.61,4.52 SV4.9
N$24
  Top 0.203: IC1.5 39.37,7.54 39.37,5.59 38.3,4.52 SV4.11
N$25
  Bottom 0.203: SV4.13 36.7,5.59 39.37,5.59 41.33,7.54 41.86,7.54 IC1.6
N$26
  Bottom 0.203: IC1.9 47.02,15.19 46.48,15.19 40.97,9.68 36.88,9.68 35.28,8.08 35.28,6.66 33.15,4.52 SV4.15
N$27
  Top 0.203: JP3.2 30.66,28.7 31.37,28.7 32.61,29.95 36.35,29.95 36.88,29.41 M1.MS3
N$28
  Bottom 0.203: IC1.11 35.99,9.32 34.04,9.32 32.79,8.08 32.79,6.66 30.66,4.52 SV4.17
N$29
  Top 0.203: SV4.2 50.75,2.03 48.44,2.03 SV4.4 48.26,2.03 45.95,2.03 SV4.6 45.77,2.03 43.28,2.03 SV4.8 43.1,2.03 40.79,2.03 SV4.10 40.61,2.03 38.3,2.03 SV4.12 38.13,2.03 35.64,2.03 | 29.06,2.92 29.06,5.05 28.35,5.77 28.35,9.5 31.72,12.88 31.72,15.19 IC1.15 | 29.06,2.92 28.17,2.03 SV4.20 | 29.06,2.92 29.95,2.03 30.48,2.03 SV4.18 30.66,2.03 32.97,2.03 SV4.16 33.15,2.03 35.64,2.03 | 35.64,2.03 SV4.14
N$30
  Top 0.203: M2.MS1 36.88,74.13 34.04,74.13 33.68,73.78 31.72,73.78 30.66,74.84 JP4.2
N$31
  Top 0.254: M1.M2AB 49.61,30.94 48.44,29.77 48.44,23.72 49.12,23.04 49.89,23.04 52.15,20.78 52.15,19.51 55.22,16.43 55.22,4.62 CON6.1 | CON4.2 61.04,14.05 J10.2
  Bottom 0.254: CON4.2 55.96,6.11 CON6.1
N$32
  Top 0.254: M2.M2AB 49.61,70.86 48.44,69.69 48.44,63.64 49.12,62.96 49.89,62.96 52.15,60.7 52.15,59.43 55.22,56.35 55.22,44.54 CON13.1 | CON10.2 61.04,53.96 J1.2
  Bottom 0.254: CON10.2 55.96,46.03 CON13.1
N$33  (via drill 0.35)
  Top 0.203: 31.55,10.39 v30.3,10.39 | 31.55,10.39 34.21,7.72 IC1.3 | 31.55,10.39 32.79,11.63 32.79,16.79 36.88,20.88 36.88,21.59 M1.STEP
  Bottom 0.203: v30.3,10.39 27.99,12.7 NORM_STEP.2
N$34
  Top 0.254: M2.M2A 49.66,69.05 50.85,69.05 50.95,68.95 51.77,68.95 52.46,68.25 52.46,64.44 53.42,63.49 55.67,63.49 55.95,63.21 63.55,63.21 65,64.66 65.97,64.66 66.65,63.97 66.65,63.21 67.74,62.12 68.51,62.12 69.19,61.43 69.19,60.47 68.02,59.3 J1.1 68.02,53.01 CON10.4
  Bottom 0.254: CON13.2 60.06,41.85 62.08,41.85 62.46,42.23 62.46,45.78 62.44,45.8 62.44,49.24 62.6,49.41 64.41,49.41 CON10.4
N$35
  Top 0.254: CON6.4 63.47,3.96 63.47,6.58 59.23,10.82 CON4.1 58.6,11.34 58.6,21.03 | 58.6,21.03 58.6,22.43 51.38,22.43 M1.M1B | J10.4 58.6,21.03
N$36
  Top 0.254: M2.M1A 53.52,62.75 58.77,62.75 59.4,62.12 65.97,62.12 67.13,60.95 J1.3 66.65,59.58 66.65,57.92 63.58,54.85 CON10.3
  Bottom 0.254: CON13.3 61.04,48.94 63.21,51.11 CON10.3
N$37
  Top 0.254: CON13.4 63.47,43.88 63.47,46.5 59.23,50.74 CON10.1 58.6,51.26 58.6,60.95 | 58.6,60.95 58.6,62.35 51.38,62.35 M2.M1B | J1.4 58.6,60.95
N$38
  Top 0.203: M2.SLEEP 37.06,64.17 37.06,66.66 M2.RESET
N$39  (via drill 0.35)
  Top 0.203: 6.48,65.6 8.79,65.6 8.97,65.42 IN1.2 | 9.5,44.08 9.5,41.95 SV5.2 | 9.5,44.08 6.48,47.11 6.48,65.6 | 6.48,65.6 v6.3,65.6 | 9.5,44.08 v23.55,44.08
  Bottom 0.203: U2R1.6 47.02,61.51 45.42,61.51 43.99,60.09 43.99,59.73 U3H1.6 43.82,59.55 43.82,59.02 40.44,55.64 40.44,54.22 35.81,49.59 29.06,49.59 v23.55,44.08 | v6.3,65.6 2.74,69.15 SV7.3
N$40
  Top 0.254: M1.M2A 49.66,29.13 50.85,29.13 50.95,29.03 51.77,29.03 52.46,28.33 52.46,24.52 53.42,23.57 55.67,23.57 55.95,23.29 63.55,23.29 65,24.74 65.97,24.74 66.65,24.05 66.65,23.29 67.74,22.2 68.51,22.2 69.19,21.52 69.19,20.55 68.02,19.38 J10.1 68.02,13.09 CON4.4
  Bottom 0.254: CON6.2 60.06,1.93 62.08,1.93 62.46,2.31 62.46,5.87 62.44,5.89 62.44,9.32 62.6,9.49 64.41,9.49 CON4.4
N$41
  Top 0.254: M1.M1A 53.52,22.84 58.77,22.84 59.4,22.2 65.97,22.2 67.13,21.03 J10.3 66.65,19.66 66.65,18.01 63.58,14.93 CON4.3
  Bottom 0.254: CON6.3 61.04,9.02 63.21,11.19 CON4.3
N$42  (via drill 0.35)
  Top 0.203: v34.37,67.3 35.93,67.3 36.43,67.81 37.38,67.81 38.43,66.76 38.43,66.24 39.03,65.65 40.46,65.65 U2R1.5 | v12.49,73.93 13.41,73.01 17.69,73.01 18.71,72 19.55,72 20.56,73.01 v21.67,73.01
  Bottom 0.203: U3H1.5 45.24,59.55 46.66,59.55 47.02,59.2 U2R1.5 | TERM1.2 4.52,74.13 5.59,74.13 9.5,78.04 SV6.2 9.6,76.82 v12.49,73.93 | v34.37,67.3 33.95,67.3 33.72,67.07 32.48,67.07 32.25,67.3 27.67,67.3 25.98,68.98 25.98,70.13 23.36,72.76 21.92,72.76 v21.67,73.01
N$43
  Bottom 0.203: 4.52,73.06 3.99,73.06 2.74,71.82 SV7.4 | IN1.4 8.97,67.2 3.99,62.22 3.99,53.51 6.3,51.2 6.3,49.94 7.35,48.88 8.04,48.88 9.09,47.83 9.09,47.14 9.76,46.47 12.65,46.47 14.66,44.47 14.66,41.95 SV5.4 | 9.32,68.44 8.97,68.09 IN1.4 | 9.32,68.44 10.21,69.33 10.21,70.93 10.92,71.64 11.1,71.64 14.66,75.2 14.66,78.04 SV6.4 | 4.52,73.06 9.14,68.44 9.32,68.44 | 4.52,73.06 TERM1.1 | 9.32,68.44 IN1.4
N$44
  Top 0.203: U2R1.8 47.19,66.66 47.19,70.4 R8.2 48.46,71.87 48.46,72.22 49.13,72.89 50.08,72.89 50.75,72.22 50.75,71.87 C14.1
  Bottom 0.203: U3H1.8 41.5,59.73 41.5,60.09 45.06,63.64 45.59,63.64 45.95,64 45.95,65.6 47.02,66.66 U2R1.8
N$45
  Bottom 0.406: SV6.6 19.91,77.99 20.47,77.43 20.47,76.19 | 20.47,76.19 20.47,68.5 18.8,66.83 18.8,54.9 17.83,53.94 15.29,53.94 14.05,52.69 14.05,47.26 15.44,45.86 15.72,45.86 19.63,41.95 SV5.6 | 58.75,66.82 56.79,64.86 C13.+ | 58.75,66.82 63.5,71.57 X2.2 | 58.75,66.82 53.44,72.12 C7.1 53.16,72.41 53.16,73.24 49.81,76.6 M2.VMOT 49.53,76.88 48.34,78.07 44.01,78.07 41.52,75.58 34.2,75.58 33.61,76.16 20.5,76.16 20.47,76.19 | 6=12V1.1 20.47,76.19
N$46
  Top 0.203: R11.1 39.55,73.06 39.55,76.8 C9.1 39.37,76.98 37.06,76.98 M2.ENABLE | CON9.2 5.23,54.04 5.23,56.35 CON8.1 | Q7.D 17.32,74.31 22.83,74.31 Q8.D
  Bottom 0.203: CON8.1 5.23,56.53 5.23,59.91 10.21,64.89 10.21,68.26 11.28,69.33 12.34,69.33 17.15,74.13 Q7.D | Q8.D 23.19,74.03 25.26,74.03 26.28,73.01 30.9,73.01 31.95,71.96 31.95,68.1 32.62,67.43 33.57,67.43 34.24,68.1 34.24,70.69 36.56,73.01 R11.1
N$47
  Top 0.203: CON9.1 7.72,53.86 15.37,53.86 16.43,52.8 D3.A
  Bottom 0.203: Q8.S 22.83,71.64 22.83,70.08 19.25,66.5 19.25,54.09 17.86,52.69 D3.A
N$48
  Top 0.203: 16.08,56.53 16.08,56.35 16.43,56 D4.A 16.08,56.53 | 16.08,56.53 7.72,56.53 CON8.2
  Bottom 0.203: D4.A 16.59,67.59 16.08,68.1 16.08,70.6 Q7.S
N$49
  Top 0.203: Q5.D 24.08,49.59 24.08,51.2 23.01,52.26 23.01,54.75 24.08,55.82 D4.C
N$50
  Bottom 0.203: Q6.D 17.86,45.86 19.1,47.11 20.35,47.11 NO_END_SW1.1 20.52,47.28 21.06,47.28 23.19,49.42 23.19,51.73 24.08,52.62 D3.C
N$51
  Bottom 0.203: Q7.G 19.1,72.89 19.1,70.4 17.32,68.62 R14.1 17.86,67.93 17.86,55.52 17.06,54.73 15.32,54.73 11.76,51.17 11.76,49.9 10.39,48.53 10.39,47.64 CON11.3
N$52
  Top 0.203: R13.1 25.32,77.33 24.97,76.98 24.97,73.06 Q8.G 24.79,72.89 24.79,72 23.01,70.22 23.01,64.94 17.75,59.68 17.75,52.16 15.9,50.31 10.39,50.31 CON12.3
N$53
  Bottom 0.203: IC2.4 37.06,47.64 37.41,47.64 39.01,49.24 44.88,49.24 46.13,47.99 46.13,46.57 48.26,44.44 SV8.3
N$54
  Top 0.203: IC2.7 44.53,45.68 45.77,44.44 SV8.5
N$55
  Top 0.203: IC2.10 44.53,49.59 43.28,48.35 43.28,44.44 SV8.7
N$56
  Top 0.203: IC2.1 29.41,47.46 29.95,47.46 31.9,45.51 36.17,45.51 37.06,44.62 37.06,44.08 37.77,43.37 39.55,43.37 40.61,44.44 SV8.9
N$57
  Top 0.203: IC2.5 39.37,47.46 39.37,45.51 38.3,44.44 SV8.11
N$58
  Bottom 0.203: SV8.13 36.7,45.51 39.37,45.51 41.33,47.46 41.86,47.46 IC2.6
N$59
  Bottom 0.203: IC2.9 47.02,55.11 46.48,55.11 40.97,49.59 36.88,49.59 35.28,47.99 35.28,46.57 33.15,44.44 SV8.15
N$60
  Bottom 0.203: IC2.11 35.99,49.24 34.04,49.24 32.79,47.99 32.79,46.57 30.66,44.44 SV8.17
N$61
  Top 0.203: SV8.2 50.75,41.95 48.44,41.95 SV8.4 48.26,41.95 45.95,41.95 SV8.6 45.77,41.95 43.28,41.95 SV8.8 43.1,41.95 40.79,41.95 SV8.10 40.61,41.95 38.3,41.95 SV8.12 38.13,41.95 35.64,41.95 | 29.06,42.84 29.06,44.97 28.35,45.68 28.35,49.42 31.72,52.8 31.72,55.11 IC2.15 | 29.06,42.84 28.17,41.95 SV8.20 | 29.06,42.84 29.95,41.95 30.48,41.95 SV8.18 30.66,41.95 32.97,41.95 SV8.16 33.15,41.95 35.64,41.95 | 35.64,41.95 SV8.14
N$62  (via drill 0.35)
  Top 0.203: 31.55,50.31 v30.3,50.31 | 31.55,50.31 34.21,47.64 IC2.3 | 31.55,50.31 32.79,51.55 32.79,56.71 36.88,60.8 36.88,61.51 M2.STEP
  Bottom 0.203: v30.3,50.31 27.99,52.62 NORM_STEP1.2
N$63
  Bottom 0.203: IC2.2 31.72,47.46 31.72,47.11 29.41,44.8 29.41,44.08 30.12,43.37 49.68,43.37 50.75,44.44 SV8.1
N$64  (via drill 0.35)
  Top 0.406: v16.59,76.19 15.8,75.4 12.65,75.4 9.4,72.15 9.4,70.91 IN1.6
  Bottom 0.406: 6=5V1.1 7.34,72.12 7.34,71.57 8.18,70.73 8.74,70.73 IN1.6 | 6=12V1.2 v16.59,76.19
STEP
  Top 0.203: Q2.S 17.86,8.43 26.04,8.43 Q1.G
  Bottom 0.203: 40.61,23.37 40.26,23.37 39.55,24.08 U2R.2 | 40.61,23.37 41.86,23.37 42.57,24.08 42.57,24.79 U3H.2 | NO_END_SW.2 20.35,8.26 17.86,8.26 Q2.S | Q1.G 26.92,9.14 26.92,12.7 NORM_STEP.1 27.1,12.88 27.1,13.41 27.46,13.77 | 27.46,13.77 28.17,13.77 28.35,13.59 32.08,13.59 33.68,15.19 34.21,15.19 IC1.14 34.39,15.37 34.93,15.37 38.13,18.57 38.13,19.28 39.01,20.17 39.55,20.17 40.61,21.23 40.61,23.37 | 27.46,13.77 27.46,14.48 24.26,17.68 24.26,18.39 R2.1
STEP1
  Top 0.203: Q6.S 17.86,48.35 26.04,48.35 Q5.G
  Bottom 0.203: 40.61,63.29 40.26,63.29 39.55,64 U2R1.2 | 40.61,63.29 41.86,63.29 42.57,64 42.57,64.71 U3H1.2 | NO_END_SW1.2 20.35,48.17 17.86,48.17 Q6.S | Q5.G 26.92,49.06 26.92,52.62 NORM_STEP1.1 27.1,52.8 27.1,53.33 27.46,53.69 | 27.46,53.69 28.17,53.69 28.35,53.51 32.08,53.51 33.68,55.11 34.21,55.11 IC2.14 34.39,55.28 34.93,55.28 38.13,58.48 38.13,59.2 39.01,60.09 39.55,60.09 40.61,61.15 40.61,63.29 | 27.46,53.69 27.46,54.4 24.26,57.6 24.26,58.31 R9.1

## Text on the board
Top: Top | by Hardi | Top | by Hardi
Bottom: Bot | by Hardi | Bot | by Hardi
tNames: R6 | M1 | C2 | GND | GND | R4 | Q4 | C10 | DOut | Q3 | R7 | +12V | DIn | R1 | C4 | +5V | +LED | GND | C5 | R3 | R2 | R5 | C1 | End Switch NC | U2R | D2 | SW2 | Norm. / Closed | SW1 | D1 | J10 | End SW Hall | IC1 | SW2 | C3 | C11 | SW1 | WS2811 Stepper | +5V | GND | IN | Q2 | Q1 | +5V | GND | Slow | Fast | by Hardi | R6 | M1 | C2 | GND | GND | R4 | Q3 | Q4 | C10 | DOut | R7 | +12V | DIn | R1 | C4 | +5V | +LED | GND | C5 | R3 | R2 | R5 | C1 | End Switch NC | U2R | D2 | SW2 | Norm. / Closed | SW1 | D1 | J10 | End SW Hall | IC1 | SW2 | C3 | C11 | SW1 | WS2811 Stepper | +5V | GND | IN | Q2 | Q1 | +5V | GND | Slow | Fast | by Hardi
bNames: 6=12V | TERM | 6=5V | U3H | WS2811 Stepper | Idee von Erich / und Michael | Full Step (Fast) / 1/2 Step / 1/4 Step / 1/8 Step / 1/16 Step (Slow) | by Hardi | MS3 / - / - / - / - / X | MS2 / - / - / X / X / X | https://wiki.mobaledlib.de/p550 | MS1 / - / X / - / X / X | NORM_STEP | NO_END_SW | 6=12V | 6=5V | TERM | U3H | WS2811 Stepper | Idee von Erich / und Michael | Full Step (Fast) / 1/2 Step / 1/4 Step / 1/8 Step / 1/16 Step (Slow) | by Hardi | MS3 / - / - / - / - / X | MS2 / - / - / X / X / X | NORM_STEP | https://wiki.mobaledlib.de/p550 | MS1 / - / X / - / X / X | NO_END_SW